# Altium PCB tl.PcbDoc
Units mm, origin at the board's own origin, x right, y up, seen from the top; angles counter-clockwise.
Board outline 24 x 45 mm, 2 copper layers (Top Layer, Bottom Layer), stack 1.071 mm thick; 2 components, 2 nets, 10 pads, 35 vias.
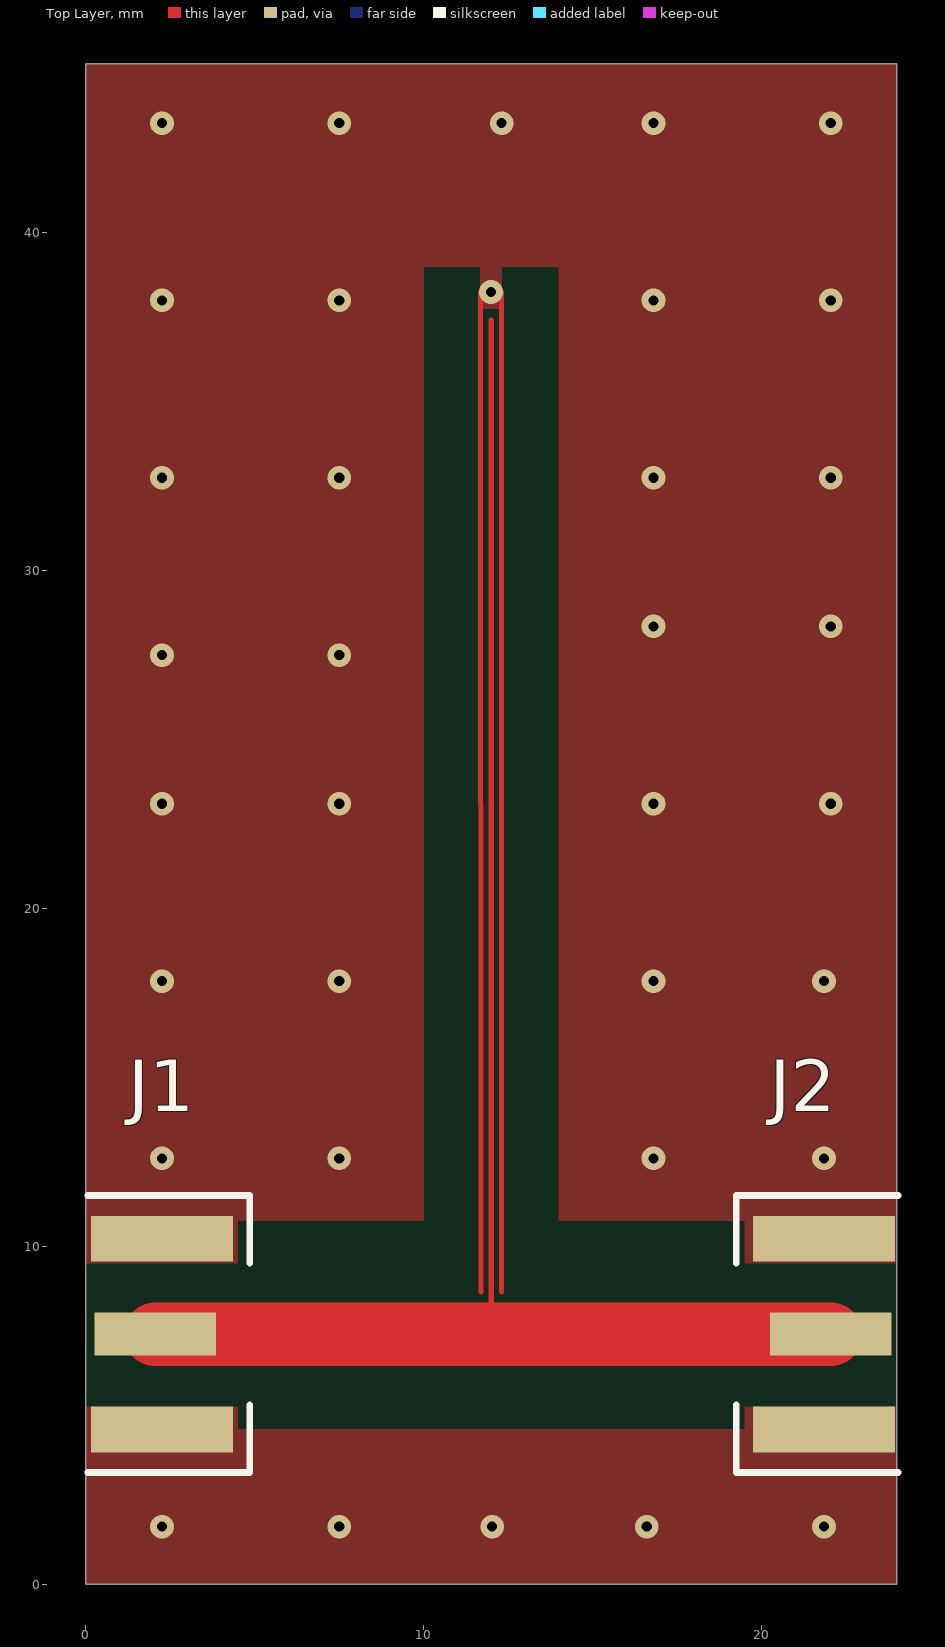
[diagram p0: Top Layer view]
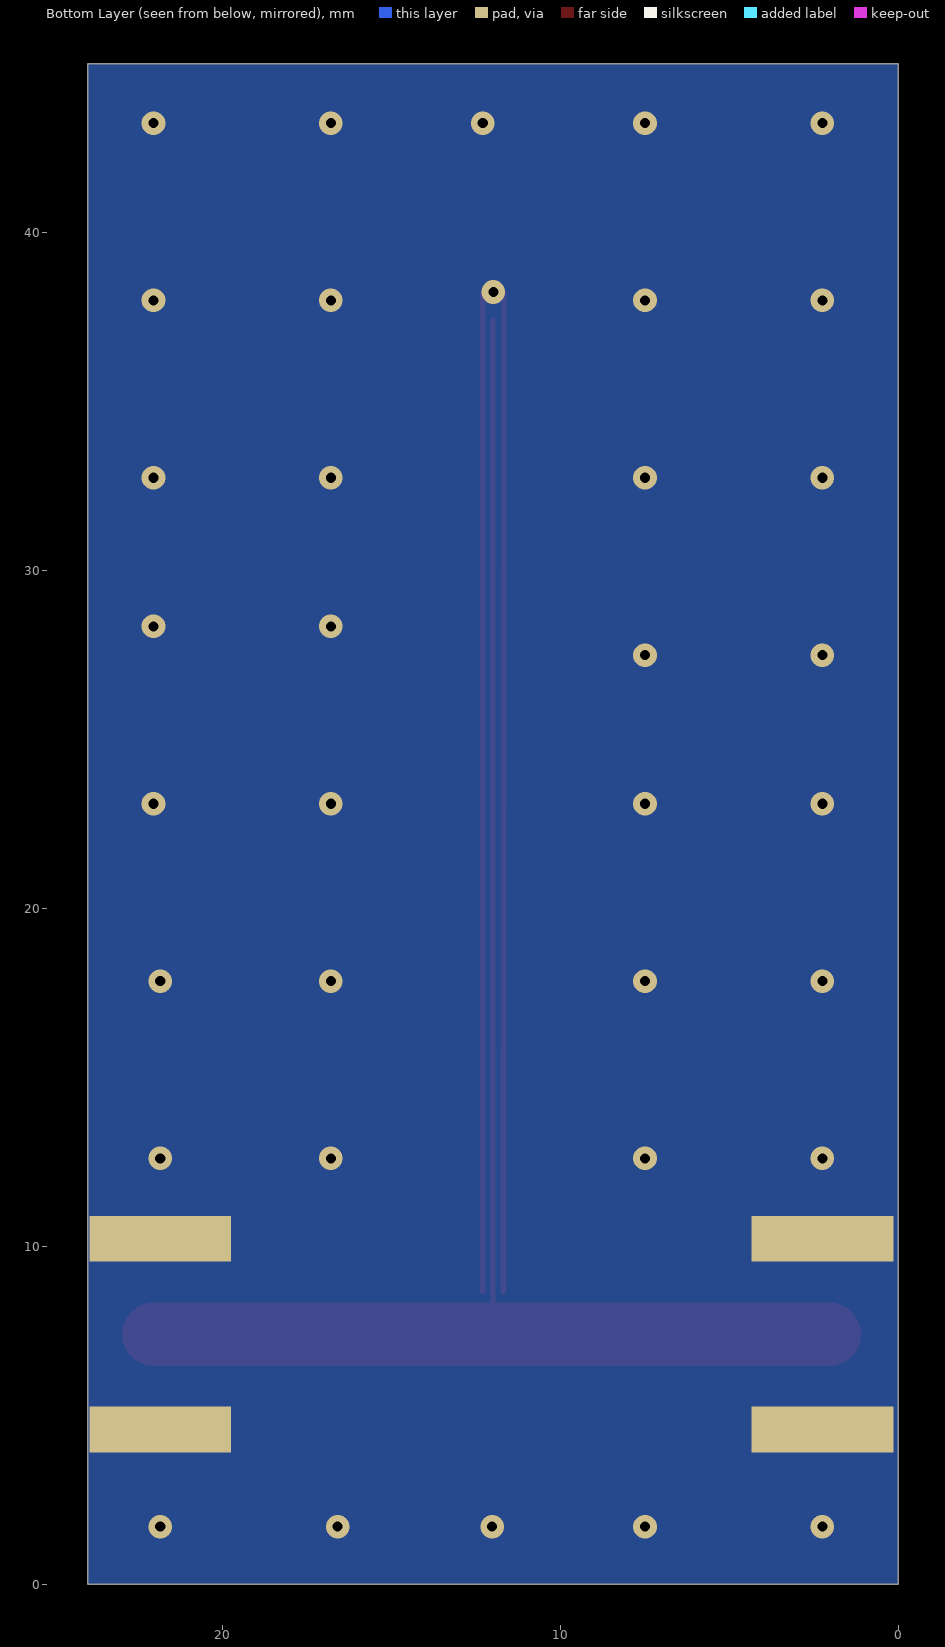
[diagram p1: Bottom Layer view, seen from below]

## Layer stack, top to bottom
Top Solder: solder mask 0.0102, Solder Resist, Dk 3.5
Top Layer: signal copper 0.0356
Dielectric 1: dielectric 1, FR-4, Dk 4.8
Bottom Layer: signal copper 0.0356
Bottom Solder: solder mask 0.0102, Solder Resist, Dk 3.5

## Board outline
0,0 0,45 24,45 24,0

## Design rules (kind name [scope] priority, off if disabled: settings)
Clearance [All] p1: gap=0.254 ignorepadtopadclearanceinfootprint=FALSE except(0: Arc-Hole Track-Hole SMDPad-Hole THPad-Hole Via-Hole Fill-Hole Poly-Hole Region-Hole Text-Hole; 0.152: Arc-Arc Arc-Track Track-Track)
PlaneConnect [All] p1: planeconnectstyle=Direct reliefexpansion=0.508 reliefentries=4 reliefconductorwidth=0.254 reliefairgap=0.254
PolygonConnect [All] p1: connectstyle=Direct reliefconductorwidth=0.254 reliefentries=4 polygonreliefangle="90 Angle" airgapwidth=0.254
RoutingVias [All] p1: holewidth=0.711 width=1.27 viastyle="Through Hole" minholewidth=0.711 minwidth=1.27 maxholewidth=0.711 maxwidth=1.27
SolderMaskExpansion [All] p1: expansion=0.102
Width [All] p1: maxlimit=6 minlimit=0.152 preferedwidth=0.3
29 further rules are at their usual default settings.

## Components (designator, comment, footprint, x,y, rotation, side; value= is the part's Value field where it differs from the comment)
J1 "SMA-J-P-H-ST-EM1" "SAMTEC SMA-J-P-H-ST-EM1" 2.05,7.4 r0 top
J2 "SMA-J-P-H-ST-EM1" "SAMTEC SMA-J-P-H-ST-EM1" 22.05,7.4 r180 top

## Footprints (in the part's own frame and the unit in brackets; to place one, negate y for a bottom-side part, rotate by r counter-clockwise, add the part's x,y. Pads: shape width x height; smd on the part's side, far side on the other; paste and mask are expansions set on the pad)
"SAMTEC SMA-J-P-H-ST-EM1" [mm]
  rect 3.6x1.27 smd: 1(0,0)
  rect 4.2x1.35 smd: 2(0.2,-2.825) 2(0.2,2.825)
  rect 4.2x1.35 smd far side: 2(0.2,-2.825) 2(0.2,2.825)
  silkscreen extent -2,-4.1 2.8,4.1, body extent -11.43,-3.17 1.91,3.17, height 3.67

## Part data
J1 J2: "CONN SMA JACK STR 50OHM EDGE MNT", Device Package=Tray, Frequency - Max=20GHz, Housing Color=Gold, Manufacturer="Samtec Inc.", Operating Temperature="-65°C ~ 125°C", Supplier Part Number 1=SAM8857-ND, Voltage Rating=335V, Body Finish=Gold, Body Material=Brass, Cable Group=-, Center Contact Material="Beryllium Copper", Center Contact Plating=Gold, ComponentLink1Description=Datasheet, ComponentLink1URL=http://suddendocs.samtec.com/catalog_english/sma.pdf, ComponentLink2Description=Drawing, ComponentLink2URL=http://suddendocs.samtec.com/prints/sma-j-p-x-st-em1-mkt.pdf, ComponentLink3Description="Digikey Link", ComponentLink3URL=https://www.digikey.com/products/en?keywords=SMA-J-P-H-ST-EM1, Connector Style=SMA, Dialetric Material="Polytetrafluoroethylene (PTFE)", Fastening Type=Threaded, Features=-, Insertion Loss=-, LastUpdated="3/11/2020 6:05:05 AM", Lifecycle Status=Active, Mating Cycles=-, Minimum Order=1, Mounting Feature=-, Mounting Type="Board Edge, End Launch", Number of Ports=1, Packaging=Tray, Part Number=SMA-J-P-H-ST-EM1, Part Status=Active, Price=4.33, Series=-, Supplier 1=DigiKey

## Via types
v1: diameter 0.7, hole 0.3, Top Layer to Bottom Layer, 35 vias

## Nets (pads, with @x,y where several pads share a name; then routed paths per layer and width w, separated by ;. In a path a pad name is that pad's centre, name@x,y a point inside that pad or via, vN(x,y) a via of type N, cw(c..) or ccw(c..) an arc to the next point about the centre after c; other vN are vias at no path point)
GND: J1.2 J2.2 | length 59.8
  Top Layer w0.152: 11.695,8.65 11.675,37.423 11.675,38.25 v1(11.99,38.25) 12.305,38.25 12.305,37.423 12.305,8.65
  other v1: 2.25,1.7 7.5,1.7 12.025,1.7 16.6,1.7 21.85,1.7 2.25,12.6 7.5,12.6 16.8,12.6 21.85,12.6 2.25,17.85 7.5,17.85 16.8,17.85 21.85,17.85 2.25,23.1 7.5,23.1 16.8,23.1 22.05,23.1 2.25,27.5 7.5,27.5 16.8,28.35 22.05,28.35 2.25,32.75 7.5,32.75 16.8,32.75 22.05,32.75 2.25,38 7.5,38 16.8,38 22.05,38 2.25,43.25 7.5,43.25 12.305,43.25 16.8,43.25 22.05,43.25
TL: J1.1 J2.1 | length 50
  Top Layer w0.152: 12,37.423 12,8.65 12,7.4 12.025,7.4
  Top Layer w1.88: J1.1 12,7.4 ; 12.025,7.4 J2.1

## Polygon pours and split planes (outlines as drawn)
GND on Top Layer (solid, pour order 24): 11.675,39 11.675,37.75 12.305,37.75 12.305,39
no net on Top Layer (solid, pour order 22): 11.675,37.811
GND on Top Layer (solid, pour order 20): 24,9.5 19.5,9.5 19.5,10.75 14,10.75 14,39 12,39 12,45 24,45
GND on Top Layer (solid, pour order 16): 0,9.5 4.5,9.5 4.5,10.75 10,10.75 10,39 12,39 12,45 0,45
GND on Top Layer (solid, pour order 12): 0,5.25 4.5,5.25 4.5,4.575 19.5,4.575 19.5,5.25 24,5.25 24,0 0,0
no net on Top Layer (solid, pour order 10): 0,0
no net on Top Layer "Top Layer-No Net" (solid, pour order 0): -21.105,-39.369
GND on Bottom Layer (solid, pour order 8): 0,0 0,45 24,45 24,0

## Silkscreen, mask and mechanical layers (free items; w line width, h text height)
Mechanical 1:
  the board outline again, w0.2